# EAGLE board numpad_v1 (EAGLE 9.2.1)
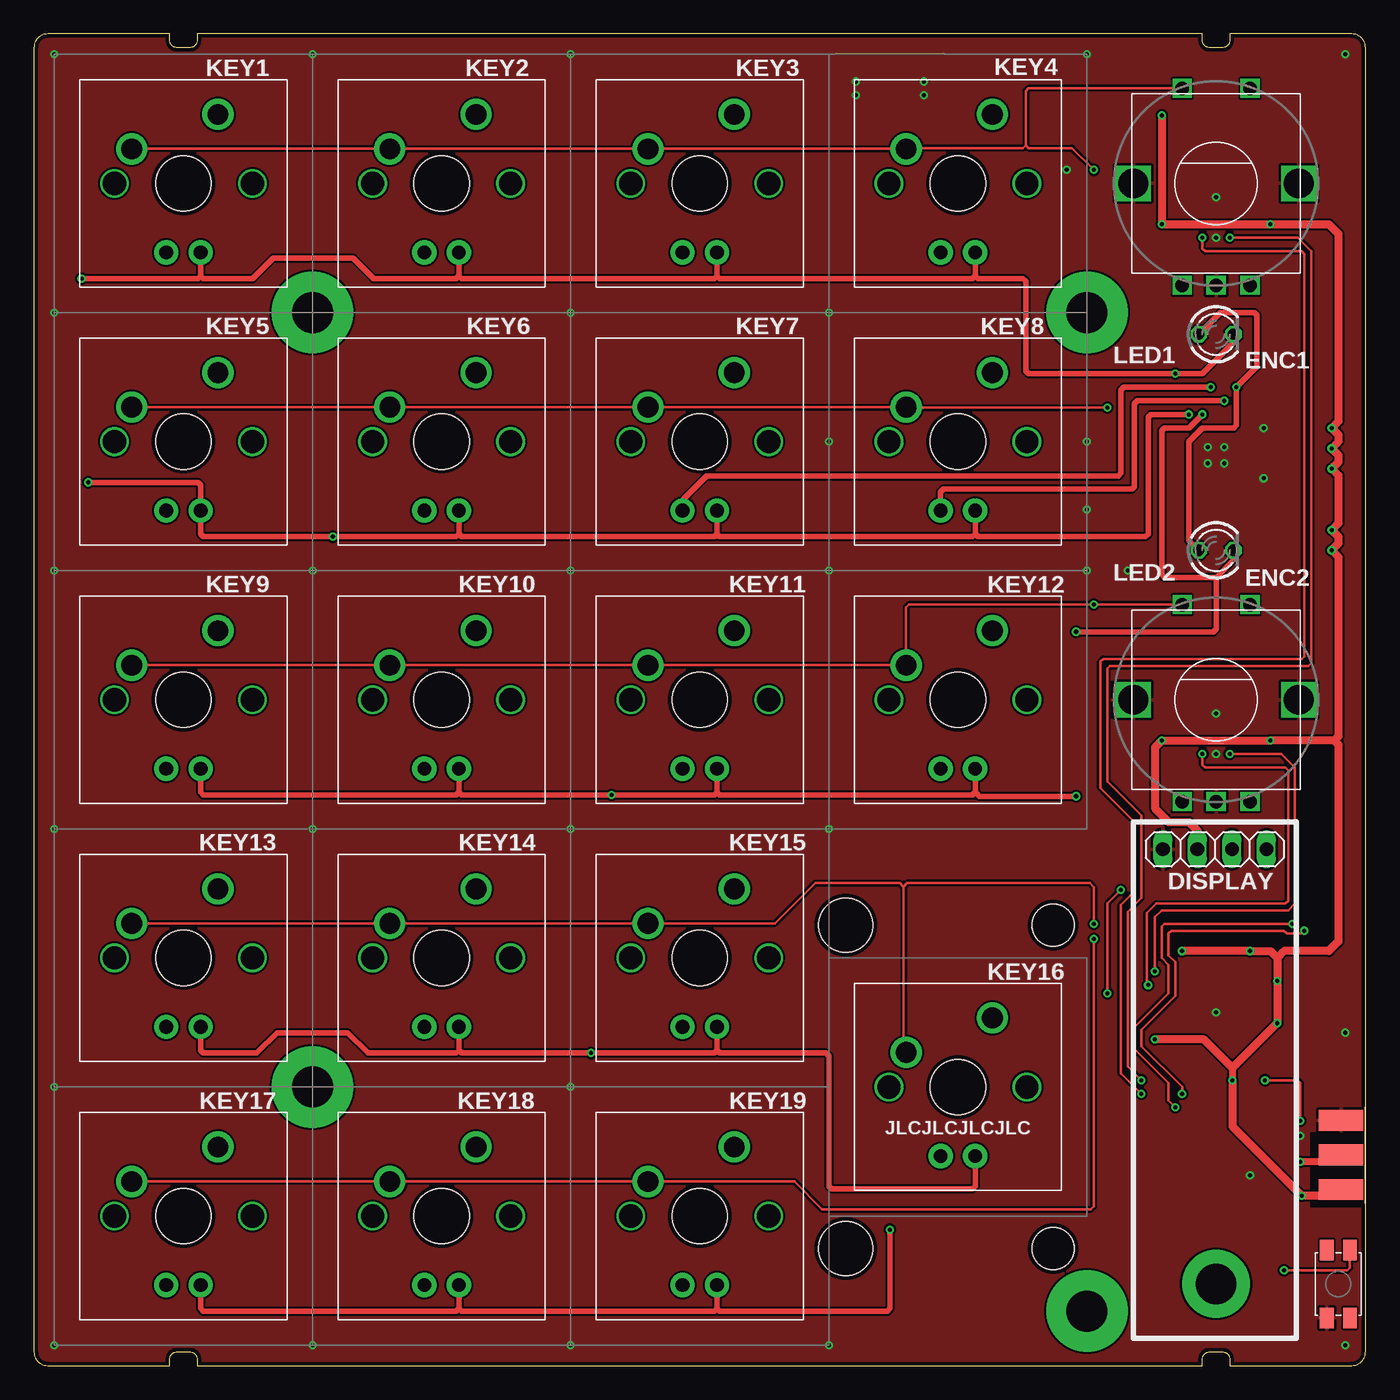
[diagram p0: board, top side]
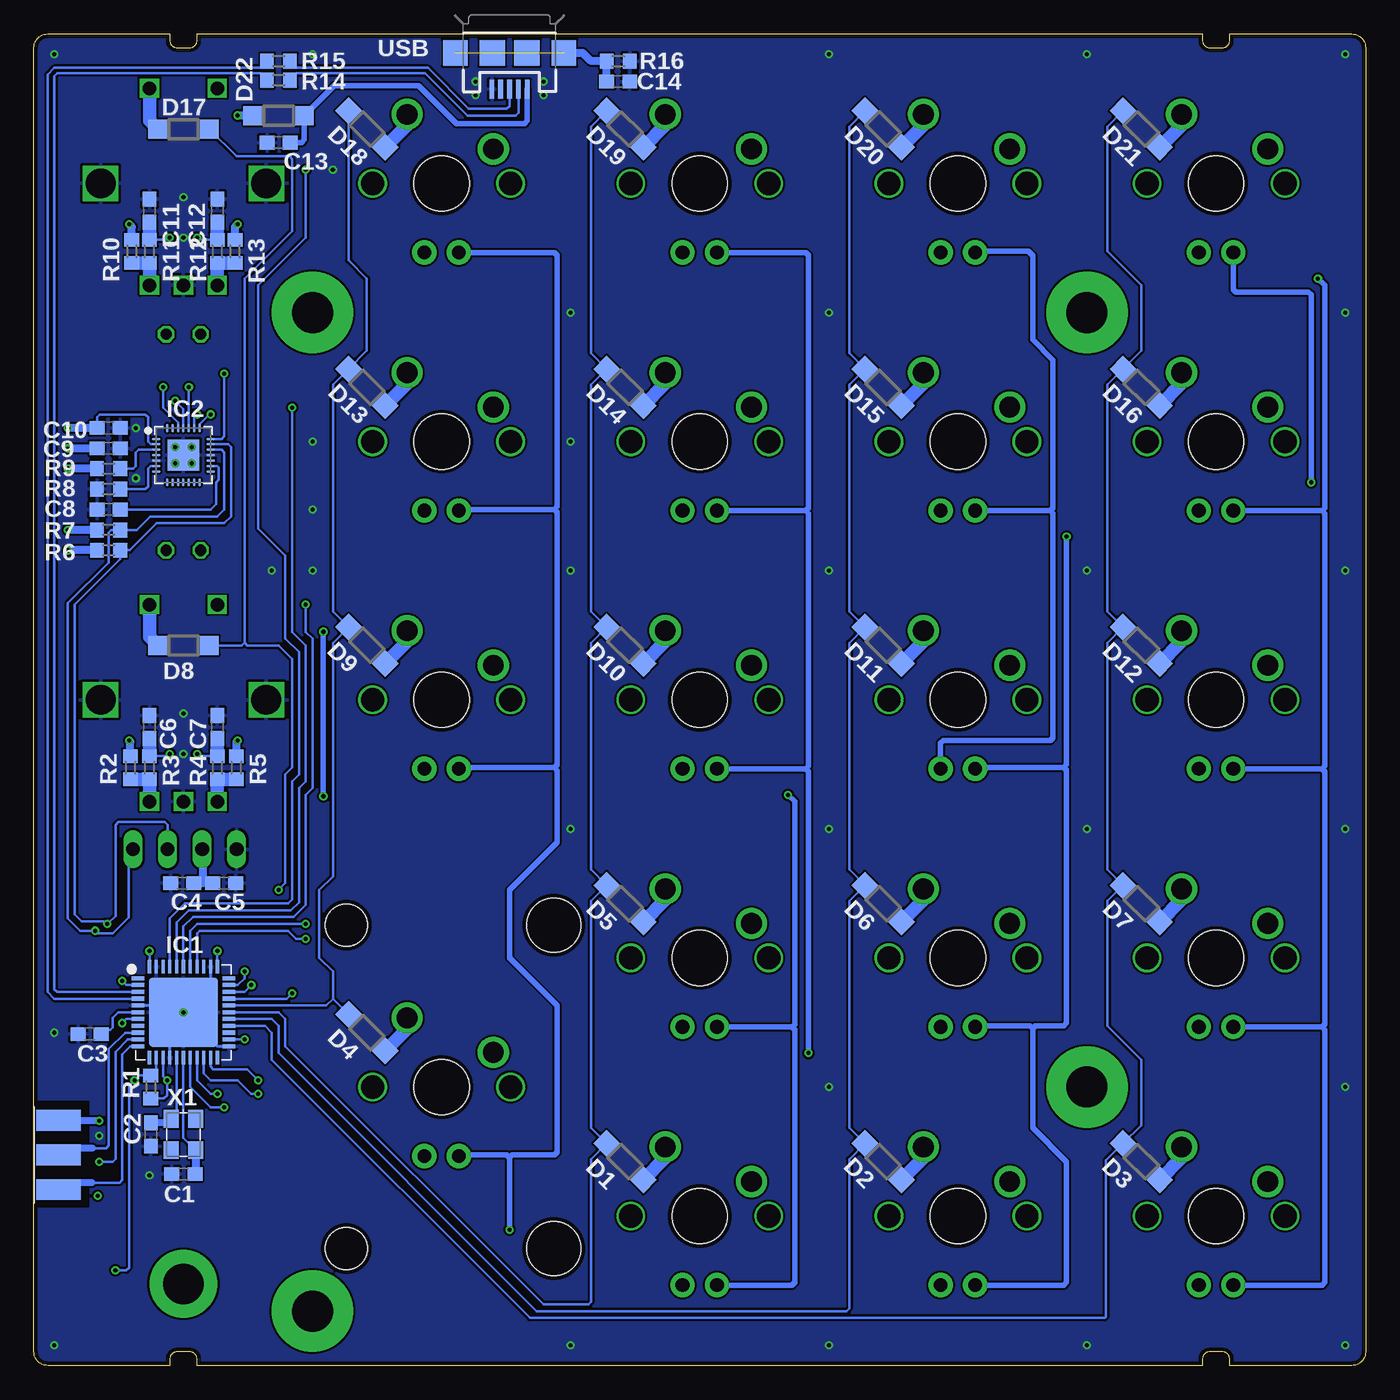
[diagram p1: board, bottom side, seen from below]

Size 98 x 98 mm. Coordinates in mm from the lower left corner, seen from the top.
Outline: 97,98 88,98 88,97.5 arc-90 87.5,97 86.5,97 arc-90 86,97.5 86,98 12,98 12,97.5 arc-90 11.5,97 10.5,97 arc-90 10,97.5 10,98 1,98 arc90 0,97 0,1 arc90 1,0 10,0 10,0.5 arc-90 10.5,1 11.5,1 arc-90 12,0.5 12,0 86,0 86,0.5 arc-90 86.5,1 87.5,1 arc-90 88,0.5 88,0 97,0 arc90 98,1 98,97 arc90 97,98
Copper layers (1*16): Top 0.035mm / dielectric 1.5mm / Bottom 0.035mm
Design rules "PCB-POOL Standard *": minimum track width 0.15mm, minimum drill 0.3mm, track to track 0.15mm, track to pad 0.15mm, pad to pad 0.15mm, via to via 0.15mm, smd to smd 0.15mm, copper to edge 0.3mm, drill to drill 0.2mm, minimum pad ring 0.2mm, minimum via ring 0.15mm, stop-mask expansion 0.075mm, vias tented up to drill 0.3mm, thermal gap 0.2mm
Holes 3.1 mm at 75,32.4 75,8.6
Holes 4 mm at 59.75,8.6 59.75,32.4
tRestrict: 3 lines
bRestrict: 3 lines

## Footprints (pad centres in the part's own frame; a part is rotated, then mirrored left to right if it is on the bottom)
C0603 = smd 1.1 x 1: 1 -0.85,0; 2 0.85,0
SOD123 = smd 1.4 x 1.4: A 1.9,0; C -1.9,0
1X04 = drill 1.016 long: 1 -3.81,0; 2 -1.27,0; 3 1.27,0; 4 3.81,0
ALPS_EC12E_SW = drill 1 square: A -2.5,-7.5; B 2.5,-7.5; C 0,-7.5; D -2.5,7; E 2.5,7 | drill 2.2 square: GND1 -6.1,0; GND2 6.1,0
QFN44G-0.5-7X7MM = smd 1 x 0.3: 1 -3.35,2.5; 2 -3.35,2; 3 -3.35,1.5; 4 -3.35,1; 5 -3.35,0.5; 6 -3.35,0; 7 -3.35,-0.5; 8 -3.35,-1; 9 -3.35,-1.5; 10 -3.35,-2; 11 -3.35,-2.5; 23 3.35,-2.5; 24 3.35,-2; 25 3.35,-1.5; 26 3.35,-1; 27 3.35,-0.5; 28 3.35,0; 29 3.35,0.5; 30 3.35,1; 31 3.35,1.5; 32 3.35,2; 33 3.35,2.5 | smd 0.3 x 1: 12 -2.5,-3.35; 13 -2,-3.35; 14 -1.5,-3.35; 15 -1,-3.35; 16 -0.5,-3.35; 17 0,-3.35; 18 0.5,-3.35; 19 1,-3.35; 20 1.5,-3.35; 21 2,-3.35; 22 2.5,-3.35; 34 2.5,3.35; 35 2,3.35; 36 1.5,3.35; 37 1,3.35; 38 0.5,3.35; 39 0,3.35; 40 -0.5,3.35; 41 -1,3.35; 42 -1.5,3.35; 43 -2,3.35; 44 -2.5,3.35 | smd 5.08 x 5.08: TAB 0,0
QFN28_4MM_0.4MM = smd 0.6 x 0.18: 1 -2,1.2; 2 -2,0.8; 3 -2,0.4; 4 -2,0; 5 -2,-0.4; 6 -2,-0.8; 7 -2,-1.2; 15 2,-1.2; 16 2,-0.8; 17 2,-0.4; 18 2,0; 19 2,0.4; 20 2,0.8; 21 2,1.2 | smd 0.18 x 0.6: 8 -1.2,-2; 9 -0.8,-2; 10 -0.4,-2; 11 0,-2; 12 0.4,-2; 13 0.8,-2; 14 1.2,-2; 22 1.2,2; 23 0.8,2; 24 0.4,2; 25 0,2; 26 -0.4,2; 27 -0.8,2; 28 -1.2,2 | smd 2.3 x 2.3: THERMAL 0,0
6PAD_ISP = smd 1.524 x 3.302 bottom: GND 2.54,0; MOSI 0,0; VCC -2.54,0 | smd 1.524 x 3.302: MISO -2.54,0; RST 2.54,0; SCK 0,0
CHERRY-MX-LED = drill 1.016 pad 1.778: LED+ -1.27,-5.08; LED- 1.27,-5.08 | drill 1.714 pad 1.93: P$3 -5.08,0; P$4 5.08,0 | drill 1.524 pad 2.286: SW1 -3.81,2.54; SW2 2.54,5.08 | hole 4.064: 0,0
LED3MM = drill 0.813 octagon: A -1.27,0; K 1.27,0
R0603 = smd 1 x 1.1: 1 -0.85,0; 2 0.85,0
EVQP2 = smd 1.5 x 1: 1 -2.5,-0.85; 2 -2.5,0.85; 3 2.5,-0.85; 4 2.5,0.85
USB-MICROB = smd 1.4 x 0.35: D+ -2.65,0; D- -2.65,-0.65; GND -2.65,1.3; ID -2.65,0.65; VBUS -2.65,-1.3 | smd 1.9 x 1.8: MT1 0,-4; MT2 0,4 | smd 1.9 x 1.9: P$1 0,-1.27; P$2 0,1.27
3.2X2.5_KX-7 = smd 1.3 x 1.1: 1 -1.15,-0.9; 2 1.15,-0.9; 3 1.15,0.9; 4 -1.15,0.9

## Placement (x,y rotation side)
C1  12pF  [C0603]  87,14.1 180 bottom
C2  12pF  [C0603]  89.4,17 270 bottom
C3  1u  [C0603]  93.9,24.4 0 bottom
C4  100n  [C0603]  87.1,35.5 0 bottom
C5  1u  [C0603]  84,35.5 180 bottom
C6  10n  [C0603]  89.5,47 270 bottom
C7  10n  [C0603]  84.5,47 270 bottom
C8  100n  [C0603]  92.5,63 0 bottom
C9  100n  [C0603]  92.5,67.5 180 bottom
C10  1u  [C0603]  92.5,69 180 bottom
C11  10n  [C0603]  89.5,85 270 bottom
C12  10n  [C0603]  84.5,85 270 bottom
C13  10u  [C0603]  80,90 0 bottom
C14  10n 100V  [C0603]  55,94.5 180 bottom
D1  1N4148W  [SOD123]  54.5,15 315 bottom
D2  1N4148W  [SOD123]  35.5,15 315 bottom
D3  1N4148W  [SOD123]  16.5,15 315 bottom
D4  1N4148W  [SOD123]  73.5,24.5 315 bottom
D5  1N4148W  [SOD123]  54.5,34 315 bottom
D6  1N4148W  [SOD123]  35.5,34 315 bottom
D7  1N4148W  [SOD123]  16.5,34 315 bottom
D8  1N4148W  [SOD123]  87,53 180 bottom
D9  1N4148W  [SOD123]  73.5,53 315 bottom
D10  1N4148W  [SOD123]  54.5,53 315 bottom
D11  1N4148W  [SOD123]  35.5,53 315 bottom
D12  1N4148W  [SOD123]  16.5,53 315 bottom
D13  1N4148W  [SOD123]  73.5,72 315 bottom
D14  1N4148W  [SOD123]  54.5,72 315 bottom
D15  1N4148W  [SOD123]  35.5,72 315 bottom
D16  1N4148W  [SOD123]  16.5,72 315 bottom
D17  1N4148W  [SOD123]  87,91 180 bottom
D18  1N4148W  [SOD123]  73.5,91 315 bottom
D19  1N4148W  [SOD123]  54.5,91 315 bottom
D20  1N4148W  [SOD123]  35.5,91 315 bottom
D21  1N4148W  [SOD123]  16.5,91 315 bottom
D22  B5819W  [SOD123]  80,92 0 bottom
DISPLAY  [1X04]  86.9,38 0 top
ENC1  EC12E_SW  [ALPS_EC12E_SW]  87,87 0 top
ENC2  EC12E_SW  [ALPS_EC12E_SW]  87,49 0 top
IC1  ATMEGA32U4-MU  [QFN44G-0.5-7X7MM]  87,26 0 bottom
IC2  IS31FL3731-SALS2  [QFN28_4MM_0.4MM]  87,67 0 bottom
ISP  AVR-ISP-6-EDGE  [6PAD_ISP]  96.2,15.5 90 bottom
KEY1  CHERRY-MX-LED  [CHERRY-MX-LED]  11,87 0 top
KEY2  CHERRY-MX-LED  [CHERRY-MX-LED]  30,87 0 top
KEY3  CHERRY-MX-LED  [CHERRY-MX-LED]  49,87 0 top
KEY4  CHERRY-MX-LED  [CHERRY-MX-LED]  68,87 0 top
KEY5  CHERRY-MX-LED  [CHERRY-MX-LED]  11,68 0 top
KEY6  CHERRY-MX-LED  [CHERRY-MX-LED]  30,68 0 top
KEY7  CHERRY-MX-LED  [CHERRY-MX-LED]  49,68 0 top
KEY8  CHERRY-MX-LED  [CHERRY-MX-LED]  68,68 0 top
KEY9  CHERRY-MX-LED  [CHERRY-MX-LED]  11,49 0 top
KEY10  CHERRY-MX-LED  [CHERRY-MX-LED]  30,49 0 top
KEY11  CHERRY-MX-LED  [CHERRY-MX-LED]  49,49 0 top
KEY12  CHERRY-MX-LED  [CHERRY-MX-LED]  68,49 0 top
KEY13  CHERRY-MX-LED  [CHERRY-MX-LED]  11,30 0 top
KEY14  CHERRY-MX-LED  [CHERRY-MX-LED]  30,30 0 top
KEY15  CHERRY-MX-LED  [CHERRY-MX-LED]  49,30 0 top
KEY16  CHERRY-MX-LED  [CHERRY-MX-LED]  68,20.5 0 top
KEY17  CHERRY-MX-LED  [CHERRY-MX-LED]  11,11 0 top
KEY18  CHERRY-MX-LED  [CHERRY-MX-LED]  30,11 0 top
KEY19  CHERRY-MX-LED  [CHERRY-MX-LED]  49,11 0 top
LED1  [LED3MM]  87,75.9 0 top
LED2  [LED3MM]  87,60 0 top
R1  10k  [R0603]  89.4,20.5 90 bottom
R2  10k  [R0603]  90.9,44 270 bottom
R3  10k  [R0603]  89.5,44 90 bottom
R4  10k  [R0603]  84.5,44 270 bottom
R5  10k  [R0603]  83.1,44 270 bottom
R6  20k  [R0603]  92.5,60 0 bottom
R7  20k  [R0603]  92.5,61.5 0 bottom
R8  20k  [R0603]  92.5,64.5 180 bottom
R9  20k  [R0603]  92.5,66 0 bottom
R10  10k  [R0603]  90.8,82 270 bottom
R11  10k  [R0603]  89.5,82 90 bottom
R12  10k  [R0603]  84.5,82 270 bottom
R13  10k  [R0603]  83.2,82 270 bottom
R14  22R  [R0603]  80,94.6 180 bottom
R15  22R  [R0603]  80,96 180 bottom
R16  1M  [R0603]  55,96 0 bottom
SW1  EVQP2  [EVQP2]  96,6 90 top
USB  [USB-MICROB]  63,96.6 90 bottom
X1  16MHz  [3.2X2.5_KX-7]  87,17 270 bottom

## Library data of the parts
C1 C2 = rcl; LCSC: C38523; SPICEPREFIX: C
C3 C5 C10 = rcl; LCSC: C15849; SPICEPREFIX: C
C4 C8 C9 = rcl; LCSC: C14663; SPICEPREFIX: C
C6 C7 C11 C12 = rcl; LCSC: C57112; SPICEPREFIX: C
C13 = rcl; LCSC: C19702; SPICEPREFIX: C
C14 = rcl; LCSC: C84709; SPICEPREFIX: C
D1-D21 = diode; LCSC: C81598
D22 = diode; LCSC: C8598
DISPLAY = pinhead
ENC1 ENC2 = switch-alps; MPN: EC12E2424407; OC_FARNELL: 1520813; OC_NEWARK: 74M1068
IC1 = MCU-ATMEGA32U4-MUR_VQFN44_; AVAILABILITY: Unavailable; DESCRIPTION: ATmega Series 32 KB Flash 2.5 KB SRAM 16 MHz 8-Bit Microcontroller - MLF/QFN-44; LCSC: C112161; MF: Microchip; MP: ATMEGA32U4-MUR; PACKAGE: VQFN-44 Microchip; PRICE: None
IC2 = microbuilder
ISP = avr-7
KEY1-KEY19 = cherrymx
LED1 LED2 = led
R1-R5 R10-R13 = rcl; LCSC: C25804; SPICEPREFIX: R
R6-R9 = rcl; LCSC: C4184; SPICEPREFIX: R
R14 R15 = rcl; LCSC: C23345; SPICEPREFIX: R
R16 = rcl; LCSC: C22935; SPICEPREFIX: R
SW1 = switch; FARNELL: 2079559; MBM: 1; PREIS: 0,738
USB = SparkFun-Connectors; DIGIKEY: 609-4052-1-ND; MBM: 1; PREIS: 0.7; PROD_ID: CONN-09505; SF_ID: PRT-08533
X1 = crystal-geyer_V1_0; LCSC: C13738

## Nets
C1: D3.C D7.C D12.C D16.C D21.C IC1.26
C2: D2.C D6.C D11.C D15.C D20.C IC1.27
C3: D1.C D5.C D10.C D14.C D19.C IC1.28
C4: D4.C D9.C D13.C D18.C IC1.29
C5: D8.C D17.C IC1.30
CA1: IC2.21 KEY1.LED- KEY2.LED- KEY3.LED- KEY4.LED- KEY5.LED+ KEY9.LED+ KEY13.LED+ KEY17.LED+ LED1.K
CA2: IC2.22 KEY1.LED+ KEY5.LED- KEY6.LED- KEY7.LED- KEY8.LED- KEY10.LED+ KEY14.LED+ KEY18.LED+
CA3: IC2.23 KEY2.LED+ KEY6.LED+ KEY9.LED- KEY10.LED- KEY11.LED- KEY12.LED- KEY15.LED+ KEY19.LED+ LED2.K
CA4: IC2.24 KEY3.LED+ KEY7.LED+ KEY11.LED+ KEY13.LED- KEY14.LED- KEY15.LED- KEY16.LED-
CA5: IC2.25 KEY4.LED+ KEY8.LED+ KEY12.LED+ KEY16.LED+ KEY17.LED- KEY18.LED- KEY19.LED-
CA6: IC2.26 LED1.A LED2.A
CA7: IC2.27
CA8: IC2.28
CA9: IC2.1
ENC_L_A: C7.2 IC1.31 R4.1
ENC_L_B: C6.2 IC1.32 R3.2
ENC_R_A: C12.2 IC1.20 R12.1
ENC_R_B: C11.2 IC1.21 R11.2
GND: C1.2 C2.2 C3.1 C4.1 C5.1 C6.1 C7.1 C8.1 C9.1 C10.1 C11.1 C12.1 C13.1 C14.1 DISPLAY.1 ENC1.C ENC1.GND1 ENC1.GND2 ENC2.C ENC2.GND1 ENC2.GND2 IC1.5 IC1.15 IC1.23 IC1.35 IC1.43 IC1.TAB IC2.5 IC2.18 IC2.THERMAL ISP.GND R8.2 R16.2 SW1.2 USB.GND
MISO: IC1.11 ISP.MISO
MOSI: IC1.10 ISP.MOSI
N$1: D21.A KEY1.SW2
N$2: D16.A KEY5.SW2
N$3: D12.A KEY9.SW2
N$4: D7.A KEY13.SW2
N$5: D15.A KEY6.SW2
N$6: D20.A KEY2.SW2
N$7: D11.A KEY10.SW2
N$8: D6.A KEY14.SW2
N$9: D5.A KEY15.SW2
N$10: D10.A KEY11.SW2
N$11: D14.A KEY7.SW2
N$12: D19.A KEY3.SW2
N$13: IC1.4 R15.2
N$14: IC1.3 R14.2
N$15: R14.1 USB.D-
N$16: R15.1 USB.D+
N$17: C1.1 IC1.17 X1.3
N$18: C13.2 D22.A USB.VBUS
N$19: C2.1 IC1.16 X1.1
N$20: C3.2 IC1.6
N$21: IC2.6 R8.1
N$22: D8.A ENC2.E
N$23: D17.A ENC1.E
N$24: C8.2 IC2.16
N$25: IC2.3 R9.2
N$26: ENC2.A R4.2 R5.2
N$28: ENC1.A R12.2 R13.2
N$31: ENC2.B R2.2 R3.1
N$33: ENC1.B R10.2 R11.1
N$34: D3.A KEY17.SW2
N$35: D2.A KEY18.SW2
N$36: D1.A KEY19.SW2
N$37: C14.2 R16.1 USB.MT1 USB.MT2 USB.P$1 USB.P$2
N$39: D4.A KEY16.SW2
N$40: D9.A KEY12.SW2
N$41: D13.A KEY8.SW2
N$42: D18.A KEY4.SW2
R1: ENC1.D IC1.41 KEY1.SW1 KEY2.SW1 KEY3.SW1 KEY4.SW1
R2: IC1.40 KEY5.SW1 KEY6.SW1 KEY7.SW1 KEY8.SW1
R3: ENC2.D IC1.39 KEY9.SW1 KEY10.SW1 KEY11.SW1 KEY12.SW1
R4: IC1.38 KEY13.SW1 KEY14.SW1 KEY15.SW1 KEY16.SW1
R5: IC1.37 KEY17.SW1 KEY18.SW1 KEY19.SW1
RST: IC1.13 ISP.RST R1.2 SW1.3
SCK: IC1.9 ISP.SCK
SCL: DISPLAY.3 IC1.18 IC2.20 R6.2
SDA: DISPLAY.4 IC1.19 IC2.19 R7.2
VCC: C4.2 C5.2 C9.2 C10.2 D22.C DISPLAY.2 IC1.2 IC1.7 IC1.14 IC1.24 IC1.34 IC1.44 IC2.2 ISP.VCC R1.1 R2.1 R5.1 R6.1 R7.1 R9.1 R10.1 R13.1

## Tracks (layer width: path | path; a pad name or v marks a point on that pad's centre or on a via)
C1
  Bottom 0.2: D21.C 19,91.19 19,82 16.5,79.5 16.5,74.69 D16.C 19,72.19 19,55.5 D12.C 19,53.19 19,36.5 D7.C 19,34.19 19,25 16.5,22.5 16.5,17.69 D3.C 19.1,15.09 19.1,3.6 19.2,3.5 61.5,3.5 80.5,22.5 80.5,24.5 81,25 IC1.26
C2
  Bottom 0.2: D20.C 38,91.19 38,74.5 D15.C 38,72.19 38,55.5 D11.C 38,53.19 38,36.5 D6.C 38,34.19 38,17.5 D2.C 38,15.19 38,4.2 38.2,4 61,4 80,23 80,25 80.5,25.5 IC1.27
C3
  Bottom 0.2: D19.C 57,91.19 57,74.5 D14.C 57,72.19 57,55.5 D10.C 57,53.19 57,36.5 D5.C 57,34.19 57,17.5 D1.C 57,15.19 57,4.7 57.2,4.5 60.5,4.5 79.5,23.5 79.5,25.5 80,26 IC1.28
C4
  Bottom 0.2: D4.C 76,27 | 76,27 76,29 77,30 77,35 76,36 76,53.19 D9.C 76,55.5 76,72.19 D13.C 73.5,74.69 73.5,80 74.84,81.34 D18.C | 76,27 76.5,26.5 IC1.29
C5  (via drill 0.3)
  Top 0.2: v80,35 79,34 v79,27.4
  Bottom 0.2: D17.C 83.1,89 79.2,89 79,88.8 79,83.5 82.5,80 82.5,53.2 | 82.5,53.2 82.7,53 D8.C | 82.5,53.2 82.3,53 80,53 79,52 79,44 79.5,43.5 79.5,35.5 v80,35 | v79,27.4 79.4,27 IC1.30
CA1  (via drill 0.3)
  Top 0.2: 31.47,80 31.27,80.2
  Top 0.4: KEY1.LED- 12.27,80.2 | 12.27,80.2 12.47,80 16.1,80 17.6,81.5 23.5,81.5 25,80 31.07,80 31.27,80.2 KEY2.LED- | KEY3.LED- 50.27,80.2 | 50.27,80.2 50.07,80 31.47,80 | v3.5,80 12.07,80 12.27,80.2 | KEY4.LED- 69.27,80.2 | 69.27,80.2 69.07,80 50.47,80 50.27,80.2 | 69.27,80.2 69.47,80 72.8,80 73,79.8 73,73.2 73.2,73 v84,73 86,73 88.27,75.27 LED1.K
  Bottom 0.2: 3.2,62.92 3,63.12 | IC2.21 84.2,68.2 84,68.4 v84,73
  Bottom 0.4: KEY13.LED+ 3.2,24.92 | 3.2,24.92 3,25.12 3,43.72 3.2,43.92 | 3.2,43.92 KEY9.LED+ | 3.2,43.92 3,44.12 3,62.72 3.2,62.92 KEY5.LED+ | v3.5,80 3,79.5 3,63.12 | KEY17.LED+ 3.2,5.92 3,6.12 3,24.72 3.2,24.92
CA2  (via drill 0.3)
  Top 0.4: 31.27,61.2 31.07,61 v22,61 12.47,61 12.27,61.2 KEY5.LED- 12.27,64.8 12.07,65 v4,65 | 31.27,61.2 KEY6.LED- | KEY7.LED- 50.27,61.2 | 50.27,61.2 50.07,61 31.47,61 31.27,61.2 | KEY8.LED- 69.27,61.2 | 69.27,61.2 69.07,61 50.47,61 50.27,61.2 | 69.27,61.2 69.47,61 81.8,61 82,61.2 82,69.8 82.2,70 v85,70
  Bottom 0.2: IC2.22 85.8,69.3 85.1,70 v85,70
  Bottom 0.4: 22.2,44.02 22,44.22 v22,61 | KEY1.LED+ 9.73,79.2 9.53,79 4.2,79 4,78.8 v4,65 | KEY10.LED+ 28.63,44.02 22.2,44.02 | KEY18.LED+ 22.2,5.92 22,6.12 22,15 24.5,17.5 24.5,24.8 | 22.2,44.02 22,43.82 22,25.2 22.2,25 24.3,25 24.5,24.8 | 24.5,24.8 24.7,25 28.65,25 KEY14.LED+
CA3  (via drill 0.3)
  Top 0.4: KEY9.LED- 12.27,42.2 12.47,42 31.07,42 31.27,42.2 | 31.27,42.2 KEY10.LED- | 50.27,42.2 50.07,42 v42.5,42 31.47,42 31.27,42.2 | 50.27,42.2 KEY11.LED- | 50.27,42.2 50.47,42 69.07,42 69.27,42.2 | 69.27,42.2 KEY12.LED- | 69.27,42.2 69.57,41.9 v76.7,41.9 | v76.7,54 86.8,54 87,54.2 87,58 | v86,70 85,69 83.2,69 83,68.8 83,58.2 83.2,58 87,58 | 87,58 88.27,59.27 LED2.K
  Bottom 0.2: 28.65,82 KEY2.LED+ | IC2.23 86.2,69.8 v86,70
  Bottom 0.4: KEY6.LED+ 23.2,62.92 | 23.2,62.92 23,63.12 23,74 24.5,75.5 24.5,81.7 24.8,82 28.65,82 | v42.5,42 42,41.5 42,25.12 42.2,24.92 | KEY10.LED- 31.27,45.8 31.07,46 23.2,46 23,46.2 23,62.72 23.2,62.92 | 42.2,24.92 KEY15.LED+ | KEY19.LED+ 42.2,5.92 42,6.12 42,24.72 42.2,24.92 | v76.7,54 v76.7,41.9
CA4  (via drill 0.3)
  Top 0.2: 31.07,23 31.27,23.2
  Top 0.4: KEY13.LED- 12.27,23.2 12.47,23 16.4,23 17.9,24.5 23.1,24.5 24.6,23 31.07,23 | KEY14.LED- 31.27,23.2 31.47,23 v41,23 50.07,23 50.27,23.2 | KEY15.LED- 50.27,23.2 | 50.27,23.2 50.47,23 58.3,23 58.5,22.8 58.5,13.2 58.7,13 69.07,13 69.27,13.2 KEY16.LED- | KEY7.LED+ 47.83,63.02 47.83,63.8 49.5,65.47 79.8,65.47 80,65.67 80,71.8 80.2,72 v86.6,72
  Bottom 0.2: IC2.24 v86.6,72
  Bottom 0.4: KEY11.LED+ 41.2,43.92 | 41.2,43.92 41,44.12 41,62.72 41.2,62.92 | 41.2,62.92 KEY7.LED+ | 41.2,62.92 41,63.12 41,81.72 41.2,81.92 KEY3.LED+ | 41.2,43.92 41,43.72 v41,23
CA5  (via drill 0.3)
  Top 0.4: KEY17.LED- 12.27,4.2 12.47,4 31.07,4 31.27,4.2 | 31.27,4.2 KEY18.LED- | 31.27,4.2 31.47,4 50.07,4 50.27,4.2 | 50.27,4.2 KEY19.LED- | 50.27,4.2 50.47,4 62.8,4 63,4.2 v63,10 | KEY8.LED+ 66.73,64.3 66.93,64.5 80.8,64.5 81,64.7 81,70.8 81.2,71 v87.6,71
  Bottom 0.2: v87.6,71 87,70.4 IC2.25
  Bottom 0.4: KEY4.LED+ 59.7,81.92 59.5,81.72 59.5,63.2 59.7,63 | KEY8.LED+ 66.65,63 59.7,63 | 59.7,63 59.5,62.8 59.5,44.2 59.7,44 | KEY12.LED+ 66.65,44 59.7,44 | 59.7,44 59.5,43.8 59.5,38.5 63,35 63,30 59.5,26.5 59.5,15.7 59.7,15.5 62.8,15.5 63,15.3 | 63,15.3 v63,10 | 63,15.3 63.2,15.5 66.65,15.5 KEY16.LED+
CA6  (via drill 0.3)
  Top 0.4: LED1.A 87.33,77.5 89.8,77.5 90,77.3 90,73.5 v88.5,72 88.5,69.2 88.3,69 86,69 85,68 85,60.73 LED2.A
  Bottom 0.2: IC2.26 87.4,69.4 88.5,70.5 v88.5,72
ENC_L_A  (via drill 0.3)
  Top 0.2: v82,28 81.9,28 81.9,33.3 82.6,34 92.1,34 92.3,34.2 92.3,43.8 92.1,44 86.2,44 86,44.2 v86,45
  Bottom 0.2: IC1.31 82.5,27.5 v82,28 | v86,45 85.85,44.85 R4.1
  Bottom 1: R4.1 C7.2
ENC_L_B  (via drill 0.3)
  Top 0.2: v82.5,29 82.5,33 83,33.5 92.3,33.5 92.8,34 92.8,44 91.8,45 v88,45
  Bottom 0.2: IC1.32 83,28 82.5,28.5 v82.5,29 | v88,45 88.15,44.85 R3.2
  Bottom 1: R3.2 C6.2
ENC_R_A  (via drill 0.3)
  Top 0.2: v81.5,20 80,21.5 80,33.9 81,34.9 81,40 78.5,42.5 78.5,51.8 78.7,52 93.3,52 93.5,52.2 93.5,81.8 93.3,82 86.2,82 86,82.2 v86,83
  Bottom 0.2: IC1.20 85.5,21.5 85,21 83,21 82,20 v81.5,20 | v86,83 85.85,82.85 R12.1
  Bottom 1: R12.1 C12.2
ENC_R_B  (via drill 0.3)
  Top 0.2: v81.5,21 80.5,22 80.5,33.4 81.5,34.4 81.5,40.5 79,43 79,51.3 79.2,51.5 93.8,51.5 94,51.7 94,82 93,83 v88,83
  Bottom 0.2: IC1.21 85,22 84.8,21.8 82.3,21.8 v81.5,21 | v88,83 88.15,82.85 R11.2
  Bottom 1: R11.2 C11.2
GND  (via drill 0.3)
  Bottom 0.2: IC1.5 87.2,26.5 87,26.3 IC1.TAB | IC1.TAB 88,25 IC1.15 | IC1.35 85,28 IC1.TAB | IC1.23 84.5,23.5 IC1.TAB
  other vias: 87,26 87,86 87,48 89.5,14 87.6,66.4 90.5,69 86.4,66.4 87.6,67.6 86.4,67.6 20.5,58.5 39.5,58.5 20.5,1.5 1.5,1.5 96.5,1.5 58.5,1.5 39.5,1.5 20.5,39.5 39.5,39.5 58.5,39.5 39.5,77.5 58.5,58.5 65.5,94.5 60.5,94.5 76,88 80.5,58.5 90.5,65.3 58.5,68 77.5,68 77.5,63 96.5,24.5 93.2,16.9 87,83 87,45 65.5,93.5 60.5,93.5 58.5,77.5 1.5,96.5 20.5,96.5 39.5,96.5 77.5,96.5 96.5,96.5 1.5,77.5 1.5,58.5 1.5,39.5 1.5,20.5 39.5,20.5 77.5,58.5
  pour Top: 97,98 1,98 arc90 0,97 0,1 arc90 1,0 97,0 arc90 98,1 98,97 arc90
  pour Bottom: 97,98 1,98 arc90 0,97 0,1 arc90 1,0 97,0 arc90 98,1 98,97 arc90
MISO
  Bottom 0.2: IC1.11 90.9,23.5 91.5,22.9 91.5,13.66 91.7,13.46 93.74,13.46
  Bottom 0.5: ISP.MISO 95.7,13.46 93.74,13.46
MOSI  (via drill 0.3)
  Top 0.5: ISP.MOSI 95.7,15 v93.2,15
  Bottom 0.2: IC1.10 91.1,24 92,23.1 92,15.2 92.2,15 v93.2,15
N$1
  Bottom 1: KEY1.SW2 13.55,91.26 D21.A
N$2
  Bottom 1: KEY5.SW2 13.54,72.27 D16.A
N$3
  Bottom 1: KEY9.SW2 13.54,53.27 D12.A
N$4
  Bottom 1: KEY13.SW2 13.54,34.27 D7.A
N$5
  Bottom 1: KEY6.SW2 32.54,72.27 D15.A
N$6
  Bottom 1: KEY2.SW2 32.54,91.27 D20.A
N$7
  Bottom 1: KEY10.SW2 32.54,53.27 D11.A
N$8
  Bottom 1: KEY14.SW2 32.54,34.27 D6.A
N$9
  Bottom 1: KEY15.SW2 51.54,34.27 D5.A
N$10
  Bottom 1: KEY11.SW2 51.54,53.27 D10.A
N$11
  Bottom 1: KEY7.SW2 51.54,72.27 D14.A
N$12
  Bottom 1: KEY3.SW2 51.54,91.27 D19.A
N$13
  Bottom 0.2: R15.2 81.35,95.5 96.5,95.5 97,95 97,27.5 96.5,27 IC1.4
N$14
  Bottom 0.2: R14.2 81.35,95.1 96.3,95.1 96.5,94.9 96.5,27.7 96.3,27.5 IC1.3
N$15
  Bottom 0.2: R14.1 78.65,95.1 69.2,95.1 66.1,92 62.55,92 62.35,92.2 USB.D-
N$16
  Bottom 0.2: R15.1 78.65,95.5 69,95.5 66,92.5 63.2,92.5 63,92.7 USB.D+
N$17
  Bottom 0.2: IC1.17 87,16.75 X1.3
  Bottom 0.6: X1.3 86.1,14.15 C1.1
N$18
  Bottom 0.4: C13.2 78.3,90 78.1,90.2 D22.A 75.9,94.2 69.7,94.2 66.9,91.4 61.9,91.4 61.7,91.6 USB.VBUS
N$19
  Bottom 0.2: IC1.16 87.5,18.55 X1.1
  Bottom 0.5: X1.1 88.2,17.85 C2.1
N$20
  Bottom 0.2: IC1.6 91.8,26 92.2,25.6 92.2,24.9 92.4,24.7 92.75,24.7 C3.2
N$21
  Bottom 0.2: IC2.6 89.4,66.2 89.6,66 89.6,64.7 89.8,64.5 R8.1
N$22
  Bottom 1: D8.A 89.5,53.6 ENC2.E
N$23
  Bottom 1: D17.A 89.5,91.6 ENC1.E
N$24
  Bottom 0.2: IC2.16 84.51,66.2 84.4,66.09 84.4,65.2 84.6,65 84.6,63.4 85,63 C8.2
N$25
  Bottom 0.2: IC2.3 90.3,67.4 90.5,67.2 90.5,66.2 90.7,66 R9.2
N$26
  Bottom 1: R5.2 R4.2 ENC2.A
N$27  (via drill 3 pad 6)
  other vias: 20.5,77.5
N$28
  Bottom 1: R13.2 R12.2 ENC1.A
N$29  (via drill 3 pad 6)
  other vias: 77.5,77.5
N$30  (via drill 3 pad 6)
  other vias: 20.5,20.5
N$31
  Bottom 1: R2.2 R3.1 ENC2.B
N$32  (via drill 3 pad 6)
  other vias: 77.5,4
N$33
  Bottom 1: R10.2 R11.1 ENC1.B
N$34
  Bottom 1: KEY17.SW2 13.54,15.27 D3.A
N$35
  Bottom 1: KEY18.SW2 32.54,15.27 D2.A
N$36
  Bottom 1: KEY19.SW2 51.54,15.27 D1.A
N$37  (3 unrouted)
  Bottom 0.6: C14.2 R16.1 57,96 57.6,96.6 USB.MT1
N$38  (via drill 3 pad 5)
  other vias: 87,6
N$39
  Bottom 1: KEY16.SW2 70.54,24.77 D4.A
N$40
  Bottom 1: KEY12.SW2 70.54,53.27 D9.A
N$41
  Bottom 1: KEY8.SW2 70.54,72.27 D13.A
N$42
  Bottom 1: KEY4.SW2 70.54,91.27 D18.A
R1  (via drill 0.3)
  Top 0.2: KEY1.SW1 KEY2.SW1 KEY3.SW1 KEY4.SW1 64.19,89.56 64.23,89.6 72.8,89.6 73,89.8 | ENC1.D 73.2,94 73,93.8 73,89.8 | 73,89.8 73.2,89.6 76.4,89.6 v78,88
  Bottom 0.2: v78,88 78,83 81.5,79.5 81.5,61.6 79.5,59.6 79.5,53.5 78.5,52.5 78.5,43.5 79,43 79,34.3 79.3,34 86.9,34 88,32.9 IC1.41
R2  (via drill 0.3)
  Top 0.2: KEY5.SW1 KEY6.SW1 KEY7.SW1 KEY8.SW1 64.23,70.5 v79,70.5
  Bottom 0.2: v79,70.5 79,54 78,53 78,43 78.5,42.5 78.5,34.1 79.1,33.5 86.6,33.5 87.5,32.6 IC1.40
R3  (via drill 0.3)
  Top 0.2: KEY9.SW1 KEY10.SW1 KEY11.SW1 KEY12.SW1 64.19,55.8 64.39,56 v78,56 ENC2.D
  Bottom 0.2: IC1.39 87,32.3 86.3,33 78.9,33 78,33.9 78,42 77.5,42.5 77.5,53.5 78,54 v78,56
R4  (via drill 0.3)
  Top 0.2: KEY13.SW1 KEY14.SW1 KEY15.SW1 54.54,32.54 57.5,35.5 63.73,35.5 63.99,35.24 | 63.99,35.24 63.99,23.24 KEY16.SW1 | 63.99,35.24 64.25,35.5 77.7,35.5 78,35.2 v78,32.5
  Bottom 0.2: v78,32.5 86,32.5 86.5,32 IC1.38
R5  (via drill 0.3)
  Top 0.2: KEY17.SW1 KEY18.SW1 KEY19.SW1 55.96,13.54 58,11.5 77.8,11.5 78,11.7 v78,31.4
  Bottom 0.2: v78,31.4 78.7,31.4 79.3,32 85.8,32 86,31.8 IC1.37
RST  (via drill 0.3)
  Top 0.2: v90.6,21 93,21 93.2,20.8 v93.2,18 | v92,7 96.65,7 96.85,7.2 SW1.3
  Bottom 0.2: IC1.13 89,21.75 R1.2 90.25,21.35 v90.6,21 91,20.6 91,7.2 91.2,7 v92,7 | 96.16,18 ISP.RST
  Bottom 0.5: v93.2,18 96.16,18
SCK
  Bottom 0.2: IC1.9 91.3,24.5 92.5,23.3 92.5,16.2 92.7,16 93.7,16
  Bottom 0.5: ISP.SCK 95.7,16 93.7,16
SCL  (via drill 0.3)
  Top 0.2: v92.6,32.5 83.2,32.5 83,32.3 83,30 83.5,29.5 83.5,27.4 81,24.9 81,23.3 83.5,20.8 83.5,19.5 v84,19
  Bottom 0.2: v84,19 85,19 86.5,20.5 IC1.18 | IC2.20 83.7,67.8 83.5,67.6 83.5,62.5 84,62 88.95,62 90.95,60 R6.2 91.65,59.35 95,56 95,33.2 94.5,32.7 92.8,32.7 v92.6,32.5 92,33.1 92,39.8 91.8,40 88.37,40 88.17,39.8 DISPLAY.3
SDA  (via drill 0.3)
  Top 0.2: v93.5,32 93.3,31.8 92.2,31.8 92,32 83.7,32 83.5,31.8 83.5,30.2 84,29.7 84,27.2 81.5,24.7 81.5,23.5 84.5,20.5 v84.5,20
  Bottom 0.2: v84.5,20 85,20 86,21 IC1.19 | IC2.19 84.2,67.4 84,67.2 84,63 84.5,62.5 89.45,62.5 90.45,61.5 R7.2 92.3,61.5 92.5,61.3 92.5,59.1 95.5,56.1 95.5,32.9 94.6,32 v93.5,32 93.3,31.8 92.2,31.8 91.01,32.99 91.01,37.7 DISPLAY.4
VCC  (via drill 0.3)
  Top 0.5: ISP.VCC 95.74,12.5 | 88.2,21.9 v88.2,21
  Top 0.6: 95.74,12.5 v93.3,12.5 88.2,17.6 v88.2,21 | v83,92 v83,84 v91,84 95.3,84 96,83.3 96,69.5 v95.5,69 96,68.5 96,68 v95.5,67.5 96,67 96,66.5 v95.5,66 96,65.5 96,62 v95.5,61.5 96,61 96,60.5 v95.5,60 96,59.5 96,46.3 95.7,46 | 95.7,46 v91,46 v83,46 82.5,45.5 82.5,41 83.5,40 85,40 85.63,39.37 DISPLAY.2 | 95.7,46 96,45.7 96,31.2 95.3,30.5 92,30.5 91.5,30 | v84.5,30.5 v89.5,30.5 91,30.5 91.5,30 | 91.5,30 v91.5,28.3 v91.5,25.2 88.2,21.9 86.1,24 v82.5,24
  Bottom 0.2: IC1.2 91.2,28 v91.5,28.3 | IC1.24 v82.5,24 | IC1.7 91.2,25.5 v91.5,25.2 | IC1.14 88.5,21.3 v88.2,21 88.2,19.9 88.45,19.65 R1.1 | IC1.44 v89.5,30.5 | IC2.2 89.4,67.8 89.6,68 89.6,69.8 89.8,70 93.15,70 93.35,69.8 C10.2 | IC1.34 v84.5,30.5
  Bottom 0.6: R2.1 90.9,45.9 v91,46 | R5.1 83.1,45.9 v83,46 | R13.1 83.2,83.8 v83,84 | R10.1 90.8,83.8 v91,84 | D22.C v83,92 | C9.2 v95.5,67.5 | R9.1 v95.5,66 | C10.2 v95.5,69 | R7.1 v95.5,61.5 | R6.1 v95.5,60 | C5.2 85.6,35.5 | 85.6,35.5 C4.2 | DISPLAY.2 85.6,37.97 85.6,35.5

## Text on the board
tPlace: JLCJLCJLCJLC
tStop: LCK | / | X | = | X | 7 | 8 | 9 | - | Y | 4 | 5 | 6 | + | NumPad v1 | 1 | 2 | 3 | ENT | ISP | 0 | 00 | , | RST
bStop: C1 | C2 | C3 | C4 | C5 | R1 | R2 | R3 | R4 | R5 | 101119kw